# EAGLE board E-MAXX Rev4 (EAGLE 9.7.0)
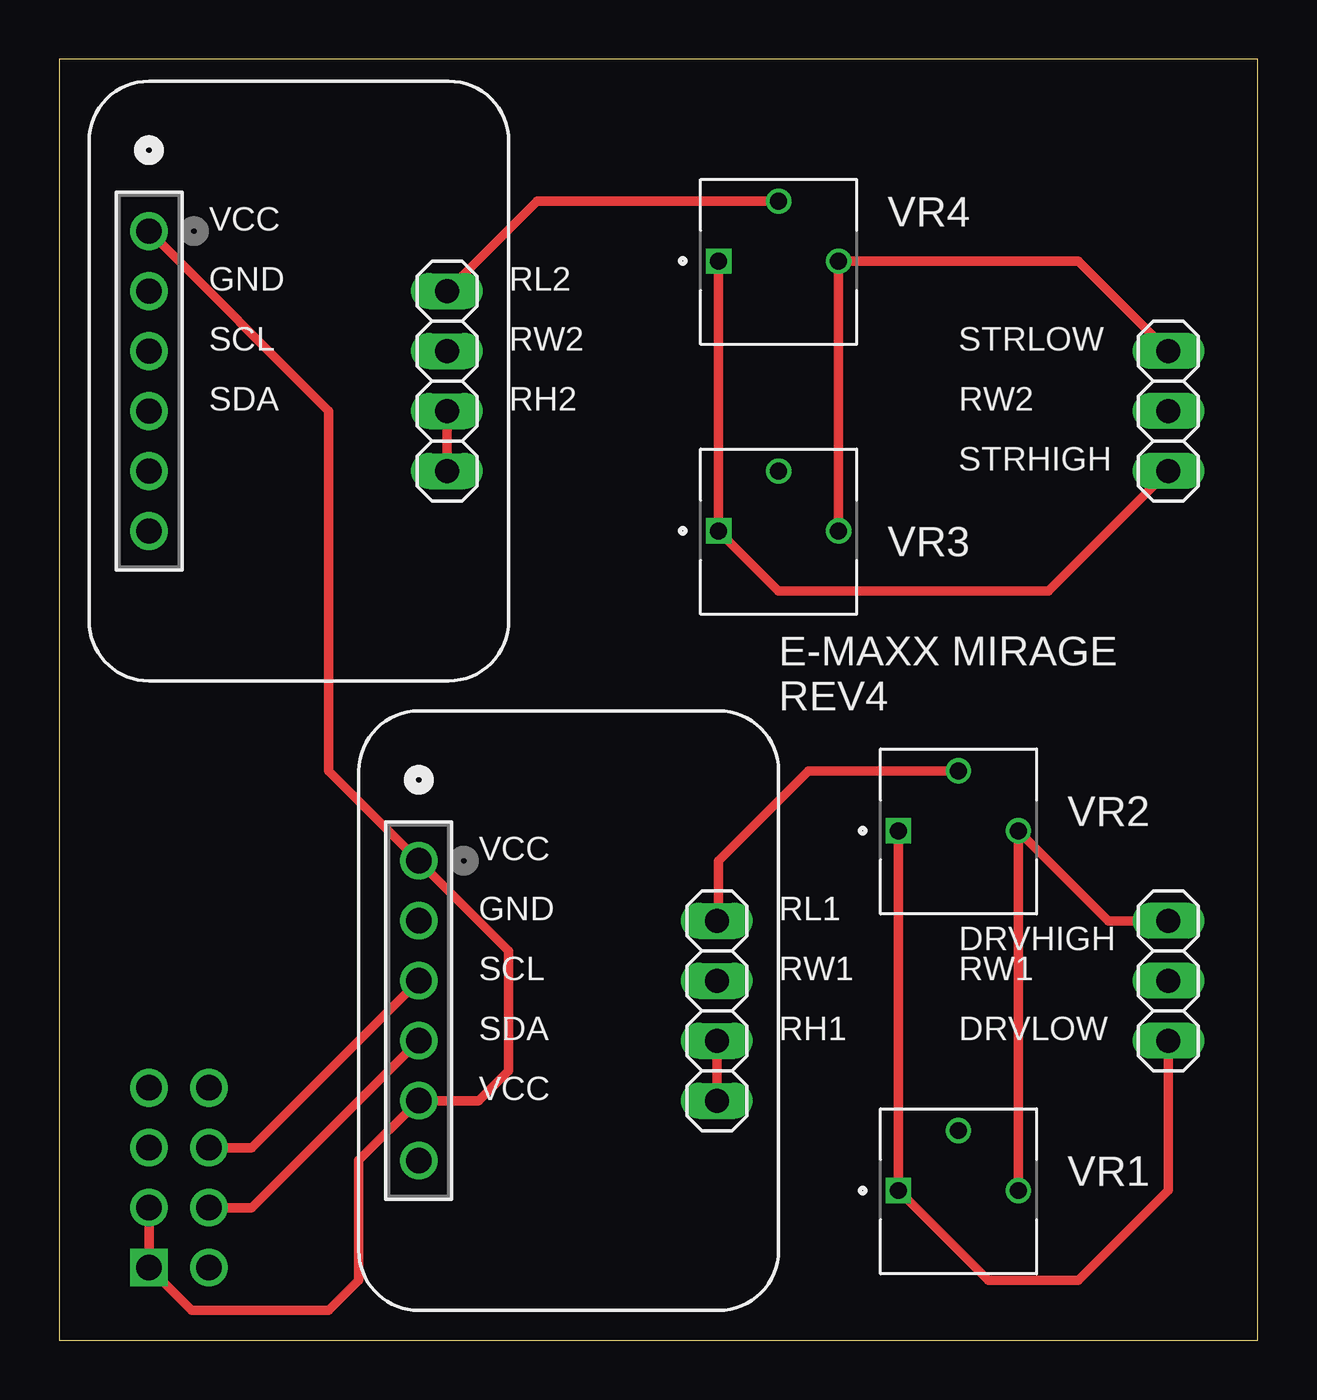
[diagram p0: board, top side]
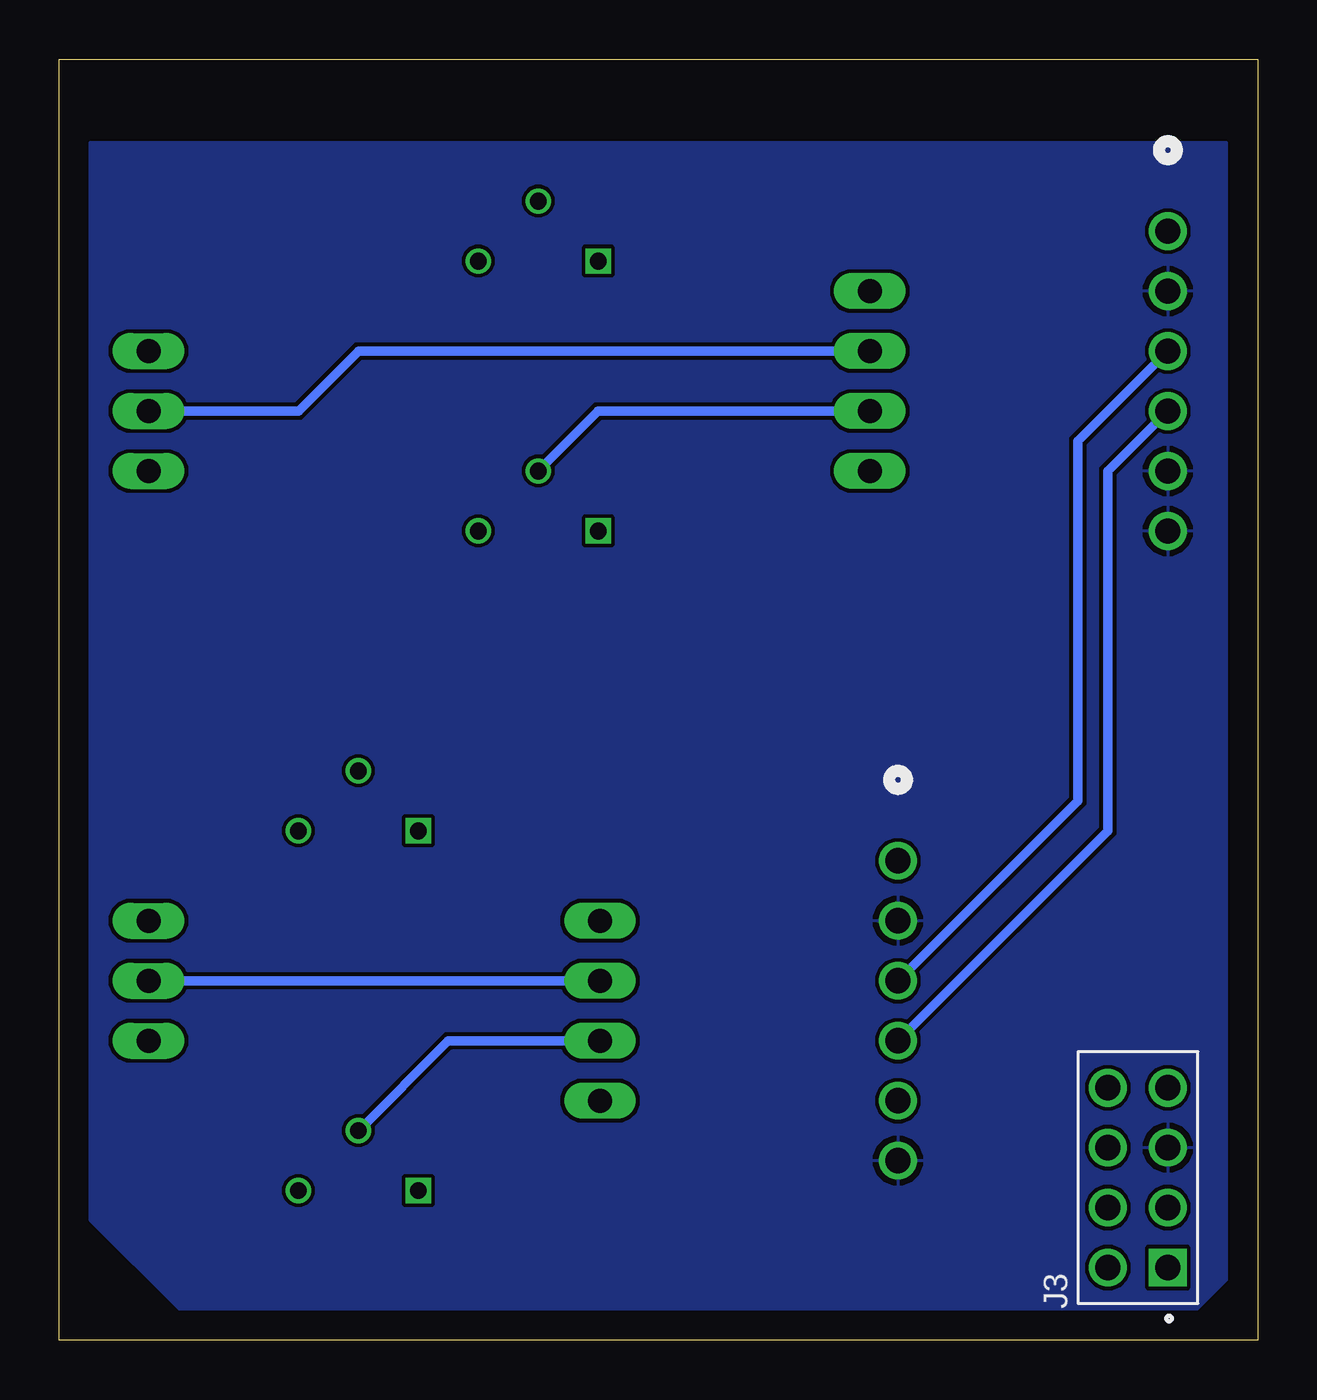
[diagram p1: board, bottom side, seen from below]

Size 50.78 x 54.28 mm. Coordinates in mm from the lower left corner, seen from the top.
Outline: 0,0 50.78,0 50.78,54.28 0,54.28 0,0
Copper layers (1*16): Top / Bottom
Stack-up Default Layer Stack: Top User Defined 0.035559375mm / Dielectric-1 User Defined 1.6mm / Bottom User Defined 0.035559375mm
Design rules: minimum copper width 6mil, minimum drill size 10mil, copper clearance wire_polygon to wire_polygon 6mil, copper clearance wire_polygon to pad_smd 6mil, copper clearance wire_polygon to via 6mil, copper clearance pad_smd to pad_smd 6mil, copper clearance pad_smd to via 6mil, copper clearance via to via 6mil, copper clearance smd to pad (same net) 6mil, copper clearance smd to via (same net) 6mil, copper clearance smd to smd (same net) 6mil, dimension clearance 15mil, via restrict clearance 0mil, restrict clearance 0mil, drill distance 6mil, keepout clearance 0mil

## Footprints (pad centres in the part's own frame; a part is rotated, then mirrored left to right if it is on the bottom)
CONN6_061LFBN-RC_SUL = drill 1.067 pad 1.321: 1 0,0; 2 2.54,0; 3 5.08,0; 4 7.62,0; 5 10.16,0; 6 12.7,0
SULLINS_PPTC042LFBN-RC = drill 1.07 square: 1 -3.81,-1.27 | drill 1.07: 2 -3.81,1.27; 3 -1.27,-1.27; 4 -1.27,1.27; 5 1.27,-1.27; 6 1.27,1.27; 7 3.81,-1.27; 8 3.81,1.27
1X04 = drill 1.016 long: 1 -3.81,0; 2 -1.27,0; 3 1.27,0; 4 3.81,0
1X03 = drill 1.016 long: 1 -2.54,0; 2 0,0; 3 2.54,0
TRIM_3362P-1-104 = drill 0.714 square: 1 -2.54,0 | drill 0.714: 2 0,2.54; 3 2.54,0

## Placement (x,y rotation side)
J1  PPTC061LFBN-RCCONN6_061LFBN-RC_SUL  [CONN6_061LFBN-RC_SUL]  3.81,46.99 270 top
J2  PPTC061LFBN-RCCONN6_061LFBN-RC_SUL  [CONN6_061LFBN-RC_SUL]  15.24,20.32 270 top
J3  PPTC042LFBN-RC  [SULLINS_PPTC042LFBN-RC]  5.08,6.9 90 bottom
JP1  PINHD-1X4  [1X04]  27.86,13.97 270 top
JP2  PINHD-1X4  [1X04]  16.43,40.64 270 top
JP3  PINHD-1X3  [1X03]  46.99,15.24 90 top
JP4  PINHD-1X3  [1X03]  46.99,39.37 90 top
VR1  3362P-1-104  [TRIM_3362P-1-104]  38.1,6.35 0 top
VR2  3362P-1-104  [TRIM_3362P-1-104]  38.1,21.59 0 top
VR3  3362P-1-104  [TRIM_3362P-1-104]  30.48,34.29 0 top
VR4  3362P-1-104  [TRIM_3362P-1-104]  30.48,45.72 0 top

## Library data of the parts
J1 J2 = 2024-05-29_03-15-51_Library; COPYRIGHT: Copyright (C) 2024 Ultra Librarian. All rights reserved.; MANUFACTURER_PART_NUMBER: PPTC061LFBN-RC; MFR_NAME: Sullins
J3 = PPTC042LFBN-RC; MANUFACTURER: Sullins; MAXIMUM_PACKAGE_HEIGHT: 8.50mm; PARTREV: L; SNAPEDA_PN: PPTC042LFBN-RC; STANDARD: Manufacturer Recommendations
JP1 JP2 = Connector; CATEGORY: Headers; DESCRIPTION: Header, Straight, 4 Position; MANUFACTURER: Generic; MPN: Generic; OPERATING_TEMPERATURE: Generic; PART_STATUS: Active; PITCH: 0.100" (2.54mm); ROHS_COMPLIANCE: Generic; SERIES: Generic; SUB-CATEGORY: Headers, Male Pins; TYPE: Board to Board or Cable, Unshrouded, Through Hole, Straight
JP3 JP4 = Connector; CATEGORY: Headers; DESCRIPTION: Header, Straight, 3 Position; MANUFACTURER: Generic; MPN: Generic; OPERATING_TEMPERATURE: Generic; PART_STATUS: Active; PITCH: 0.100" (2.54mm); ROHS_COMPLIANCE: Generic; SERIES: Generic; SUB-CATEGORY: Headers, Male Pins; TYPE: Board to Board or Cable, Unshrouded, Through Hole, Straight
VR1-VR4 = 3362P-1-104; MF: Bourns; MP: 3362P-1-205LF; PARTREV: 08/26/10; STANDARD: Manufacturer Recommendation

## Nets
DRVHIGH: JP3.1 VR1.1 VR2.1
DRVLOW: JP3.3 VR1.3 VR2.3
GND: J1.2 J1.5 J1.6 J2.2 J2.6 J3.5
RH1: JP1.3 JP1.4 VR1.2
RH2: JP2.3 JP2.4 VR3.2
RL1: JP1.1 VR2.2
RL2: JP2.1 VR4.2
RW1: JP1.2 JP3.2
RW2: JP2.2 JP4.2
SCL: J1.3 J2.3 J3.6
SDA: J1.4 J2.4 J3.4
STRHIGH: JP4.1 VR3.1 VR4.1
STRLOW: JP4.3 VR3.3 VR4.3
VCC: J1.1 J2.1 J2.5 J3.1 J3.3

## Tracks (layer width: path | path; a pad name or v marks a point on that pad's centre or on a via)
DRVHIGH
  Top 0.406: VR2.1 VR1.1 39.37,2.54 43.18,2.54 46.99,6.35 JP3.1
DRVLOW
  Top 0.406: JP3.3 44.45,17.78 VR2.3 VR1.3
GND
  pour Bottom: 1.27,50.8 49.53,50.8 49.53,5.08 45.72,1.27 2.54,1.27 1.27,2.54
RH1
  Top 0.406: JP1.3 JP1.4
  Bottom 0.406: JP1.3 34.29,12.7 VR1.2
RH2
  Top 0.406: JP2.3 JP2.4
  Bottom 0.406: JP2.3 27.94,39.37 VR3.2
RL1
  Top 0.406: JP1.1 27.94,17.86 27.94,20.32 31.75,24.13 VR2.2
RL2
  Top 0.406: VR4.2 20.24,48.26 JP2.1
RW1
  Bottom 0.406: JP1.2 JP3.2
RW2
  Bottom 0.406: JP2.2 38.1,41.91 40.64,39.37 JP4.2
SCL
  Top 0.406: J3.6 8.17,8.17 J2.3
  Bottom 0.406: J2.3 7.62,22.86 7.62,38.1 J1.3
SDA
  Top 0.406: J2.4 8.17,5.63 J3.4
  Bottom 0.406: J2.4 6.35,21.59 6.35,36.83 J1.4
STRHIGH
  Top 0.406: JP4.1 41.91,31.75 30.48,31.75 VR3.1 VR4.1
STRLOW
  Top 0.406: JP4.3 43.18,45.72 VR4.3 VR3.3
VCC
  Top 0.406: J3.3 J3.1 5.63,1.27 11.43,1.27 12.7,2.54 12.7,7.62 J2.5 17.78,10.16 19.05,11.43 19.05,16.51 J2.1 11.43,24.13 11.43,39.37 J1.1

## Text on the board
SilkscreenTop: VCC | GND | RL2 | SCL | RW2 | STRLOW | SDA | RH2 | RW2 | STRHIGH | E-MAXX MIRAGE / REV4 | VCC | GND | RL1 | DRVHIGH | SCL | RW1 | RW1 | SDA | RH1 | DRVLOW | VCC